# EAGLE board esp_pilote (EAGLE 8.0.0)
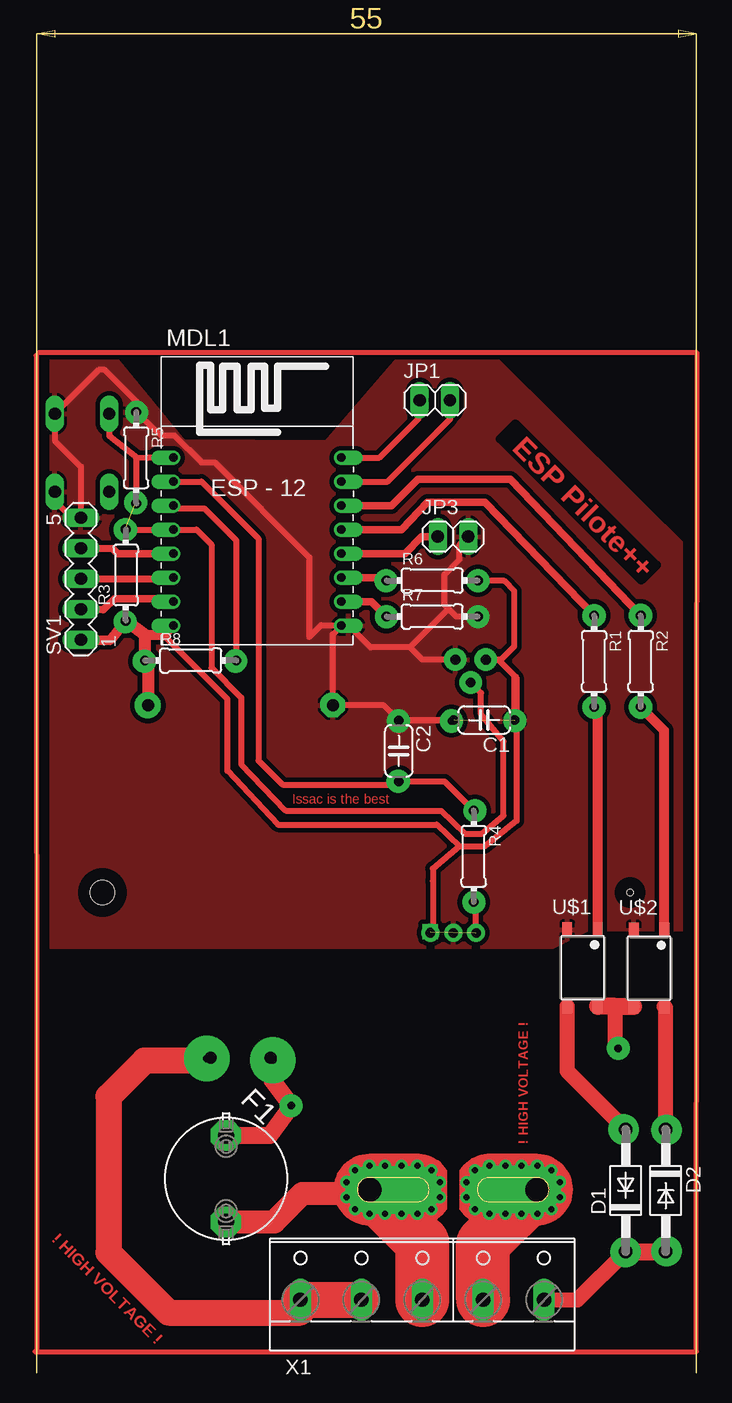
[diagram p0: board, top side]
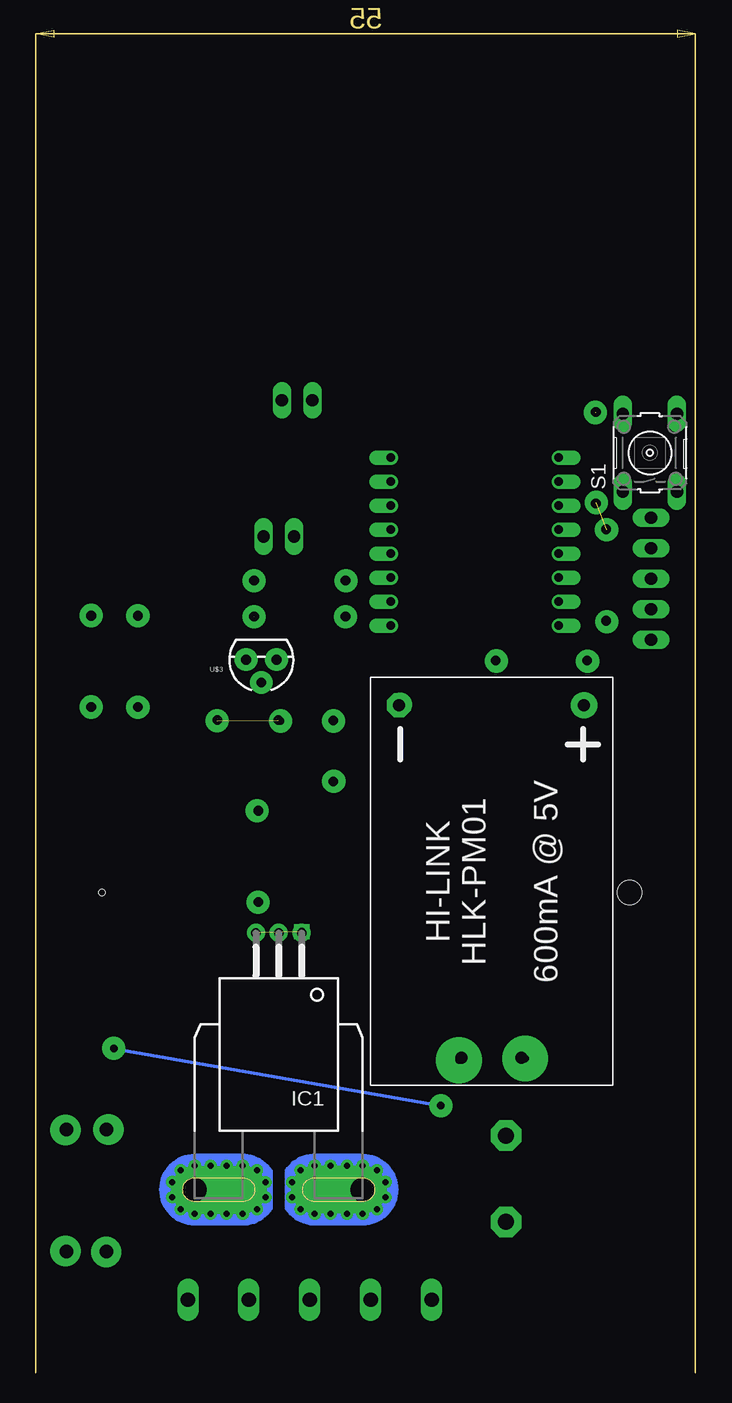
[diagram p1: board, bottom side, seen from below]

Size 55 x 111.88 mm. Coordinates in mm from the lower left corner, seen from the top.
Copper layers (1*16): Top 0.035mm / dielectric 1.5mm / Bottom 0.035mm
Design rules "default *": minimum track width 10mil, minimum drill 24mil, track to track 15mil, track to pad 25mil, pad to pad 25mil, via to via 15mil, smd to smd 25mil, copper to edge 40mil, drill to drill 8mil, minimum pad ring 10mil, minimum via ring 8mil, stop-mask expansion 4mil, vias tented up to drill 0mil, thermal gap 10mil
Net classes: 0 default: width 0.5 mm; 1 15Amp: width 12 mm; 2 10Amp: width 7.2 mm; 3 1Amp: width 0.3 mm; 4 0.5Amp: width 0.12 mm
Holes 2 mm at 5.5,40
Holes 0.5 mm at 49.5,40

## Footprints (pad centres in the part's own frame; a part is rotated, then mirrored left to right if it is on the bottom)
C050-024X044 = drill 0.813 octagon: 1 -2.54,0; 2 2.54,0
DO41-10 = drill 1.118: A 5.08,0; C -5.08,0
19559 = drill 1.321 pad 2.54 octagon: 1 -2.54,2.54; 2 2.54,-2.54
CB-PFF = drill 0.8 pad 1.5: 1 -1.91,-21.4; 2 0,-21.4; 3 1.91,-21.4 | drill 2 pad 4 offset: IP+ 7,0; IP- -7,0 | drill 0.5 pad 0.9: IP+@2 8.89,0.635; IP+@3 8.89,-0.635; IP+@4 8.175,-1.625; IP+@5 7,-2; IP+@6 5.675,-2; IP+@7 4.35,-2; IP+@8 3,-2; IP+@9 1.825,-1.625; IP+@10 1.1,-0.625; IP+@11 1.1,0.625; IP+@12 1.825,1.625; IP+@13 3,2; IP+@14 4.35,2; IP+@15 5.675,2; IP+@16 7,2; IP+@17 8.175,1.625; IP-@2 -8.89,0.635; IP-@3 -8.89,-0.635; IP-@4 -8.175,-1.625; IP-@5 -7,-2; IP-@6 -5.675,-2; IP-@7 -4.325,-2; IP-@8 -3,-2; IP-@9 -1.825,-1.625; IP-@10 -1.1,-0.625; IP-@11 -1.1,0.625; IP-@12 -1.825,1.625; IP-@13 -3,2; IP-@14 -4.325,2; IP-@15 -5.675,2; IP-@16 -7,2; IP-@17 -8.175,1.625
1X02 = drill 1.016 long: 1 -1.27,0; 2 1.27,0
ESP12 = drill 0.7 offset: ADC -7.1,3.8; CH_PD -7.1,1.8; GND 6.9,-8.2; GPIO0 6.9,-2.2; GPIO2 6.9,-4.2; GPIO4 6.9,1.8; GPIO5 6.9,-0.2; GPIO12 -7.1,-4.2; GPIO13 -7.1,-6.2; GPIO14 -7.1,-2.2; GPIO15 6.9,-6.2; GPIO16 -7.1,-0.2; RESET -7.1,5.8; RX 6.9,3.8; TX 6.9,5.8; VCC -7.1,-8.2
0204/7 = drill 0.813 octagon: 1 -3.81,0; 2 3.81,0
B3F-10XX = drill 1.016 long: 1 -3.251,2.261; 2 3.251,2.261; 3 -3.251,-2.261; 4 3.251,-2.261
MA05-1 = drill 1.016 long: 1 -5.08,0; 2 -2.54,0; 3 0,0; 4 2.54,0; 5 5.08,0
MFSOP-4 = smd 0.8 x 1.2: 1 2.54,0; 3 0,0; 4 0,-6.35; 6 2.54,-6.35
TO-92 = drill 0.813 pad 1.88: 1 -1.27,0; 2 0,1.905; 3 1.27,0
HLK-PM01 = drill 1 pad 2 octagon: AC_L -14.7,2.5; AC_N -14.7,-2.5; VO+ 14.7,-7.7; VO- 14.7,7.7
W237-5P = drill 1.194 long: 1 -10.16,-0.635; 2 -5.08,-0.635; 3 0,-0.635; 4 5.08,-0.635; 5 10.16,-0.635

## Placement (x,y rotation side)
C1  0,1µf  [C050-024X044]  37.33,54.37 180 top
C2  ?  [C050-024X044]  30.21,51.8 270 top
D1  1N4007  [DO41-10]  49.13,15.16 90 top
D2  1N4007  [DO41-10]  52.47,15.18 270 top
F1  0,5A  [19559]  15.81,16.15 315 top
IC1  ACS758LCB-050B-PFF-T  [CB-PFF]  34.75,15.24 180 bottom
JP1  [1X02]  33.22,81.02 0 top
JP3  [1X02]  34.74,69.67 0 top
MDL1  ESP  [ESP12]  18.51,70.44 0 top
R1  470  [0204/7]  46.5,59.26 270 top
R2  470  [0204/7]  50.39,59.26 270 top
R3  4.7k  [0204/7]  7.45,66.46 90 top
R4  ?  [0204/7]  36.46,43.01 270 top
R5  10k  [0204/7]  8.31,76.23 270 top
R6  10k  [0204/7]  33,66 0 top
R7  10k  [0204/7]  33,63 0 top
R8  10k  [0204/7]  12.86,59.34 0 top
S1  [B3F-10XX]  3.8,76.64 90 bottom
SV1  [MA05-1]  3.71,66.14 90 top
U$1  TLP168J  [MFSOP-4]  44.26,36.91 0 top
U$2  TLP168J  [MFSOP-4]  49.81,36.87 0 top
U$3  TEMPERATURE-SENSOR  [TO-92]  36.2,59.4 180 bottom
U$4  MAINS_CONVERTERS  [HLK-PM01]  17.01,40.92 90 bottom
X1  [W237-5P]  32.17,6.7 0 top

## Library data of the parts
C1 C2 = resistor
D1 D2 = diode
F1 = fuse; MPN: 55900000001; OC_FARNELL: 9516360; OC_NEWARK: 02P0286
IC1 = allegro; MPN: ACS758LCB-050B-PFF-T; OC_FARNELL: 1718997; OC_NEWARK: 04R7131
JP1 JP3 = pinhead
MDL1 = esp8266modules
R1-R8 = rcl
S1 = switch-omron; MPN: B3F-1000; OC_FARNELL: 176432; OC_NEWARK: 36M3542
SV1 = con-lstb; OC_FARNELL: unknown; OC_NEWARK: unknown
U$1 U$2 = TLP168J
U$3 = Eagle-JeeLabs
U$4 = captain-slow
X1 = con-wago-508; OC_FARNELL: unknown; OC_NEWARK: unknown

## Nets
230FUSED [1Amp]: F1.1 U$1.6 U$2.4 U$4.AC_L
230IN [15Amp]: F1.2 IC1.IP- IC1.IP-@2 IC1.IP-@3 IC1.IP-@4 IC1.IP-@5 IC1.IP-@6 IC1.IP-@7 IC1.IP-@8 IC1.IP-@9 IC1.IP-@10 IC1.IP-@11 IC1.IP-@12 IC1.IP-@13 IC1.IP-@14 IC1.IP-@15 IC1.IP-@16 IC1.IP-@17 X1.3
230OUT [15Amp]: IC1.IP+ IC1.IP+@2 IC1.IP+@3 IC1.IP+@4 IC1.IP+@5 IC1.IP+@6 IC1.IP+@7 IC1.IP+@8 IC1.IP+@9 IC1.IP+@10 IC1.IP+@11 IC1.IP+@12 IC1.IP+@13 IC1.IP+@14 IC1.IP+@15 IC1.IP+@16 IC1.IP+@17 X1.4
CURRENT: C2.2 MDL1.ADC R4.1
DS18B20: MDL1.GPIO16 R3.2 U$3.2
GND: C1.2 C2.1 IC1.2 JP3.2 MDL1.GND R5.1 R7.2 S1.3 S1.4 SV1.5 U$1.3 U$2.3 U$3.1 U$4.VO-
N$1 [1Amp]: D2.C U$2.6
N$2: R1.2 U$1.1
N$3: IC1.3 R4.2
N$4 [1Amp]: D1.A U$1.4
N$5 [1Amp]: MDL1.GPIO13 SV1.2
N$6 [1Amp]: MDL1.GPIO12 SV1.3
N$7 [1Amp]: MDL1.GPIO14 SV1.4
N$8: R2.2 U$2.1
N$10 [1Amp]: MDL1.GPIO5 R1.1
N$11 [1Amp]: MDL1.GPIO4 R2.1
N$13: MDL1.RESET R5.2 S1.2
N$14: JP1.1 MDL1.TX
N$15: JP1.2 MDL1.RX
N$16: MDL1.CH_PD R8.2
N$17: MDL1.GPIO2 R6.1
N$18: MDL1.GPIO15 R7.1
N$19: JP3.1 MDL1.GPIO0
NEUTRAL [15Amp]: U$4.AC_N X1.1 X1.2
PILOTE [1Amp]: D1.C D2.A X1.5
VCC: C1.1 IC1.1 MDL1.VCC R3.1 R6.2 R8.1 SV1.1 U$3.3 U$4.VO+

## Tracks (layer width: path | path; a pad name or v marks a point on that pad's centre or on a via)
230FUSED  (via drill 0.61)
  Top 1.27: v48.5,27 48.25,27.25 48.25,30.52
  Top 1.422: U$2.4 48.25,30.52 46.84,30.52 U$1.6 | F1.1 19.45,19.74 v21.25,22.25 19.57,24.53 U$4.AC_L
  Bottom 0.3: v21.25,22.25 v48.5,27
230IN
  Top 1.93: F1.2 19.81,12.56 22.19,14.93 27.44,14.93 IC1.IP-
  Top 4.5: X1.3 32.17,10.82 IC1.IP-
230OUT
  Top 4.5: X1.4 37.25,10.74 IC1.IP+
CURRENT
  Top 0.5: MDL1.ADC 13.76,74.24 18.5,69.5 18.5,51 20.5,49 29.95,49 C2.2 34.02,49.26 R4.1
DS18B20
  Top 0.5: R3.2 7.86,70.24 MDL1.GPIO16 13.35,70.24 14.59,68.99 14.59,58.72 17.07,56.25 17.07,50.69 20.78,46.83 33.75,46.8 35.71,44.9 37.16,44.9 38.95,46.42 38.95,52.6 37.07,54.84 37.07,56.64 U$3.2
GND  (via drill 0.6 pad 1.93)  (3 unrouted)
  Top 0.5: 34.37,63.63 34,64 34,66.5 35.28,67.78 35.28,68.99 JP3.2 | 34.37,63.63 35,63 R7.2 | 30.21,53.47 C2.1 | MDL1.GND 25.37,62.28 23.74,62.28 22.73,61.28 22.73,67.95 14.85,75.84 13.76,75.84 11.52,78.08 10.43,78.08 R5.1 8.51,80.75 5.7,83.55 5.2,83.55 S1.4 1.54,77.66 3.7,75.5 SV1.5 | MDL1.GND 26.06,62.24 27.86,60.43 31.17,60.43 | 31.17,60.43 34.37,63.63 | U$3.1 32.19,59.4 31.17,60.43 | SV1.5 4.73,71.31 | C2.1 28.93,55.62 U$4.VO- 24.71,61.54 MDL1.GND | C2.1 30.29,54.34 C1.2 30.24,54.37 v30.17,54.3 | 2.97,71.21 SV1.5 | 2.97,71.21 2.52,71.2 | S1.3 1.54,72.63 2.97,71.21
  other vias: 39.9,54.33 24.62,55.67 36.82,62.98 8.34,80.01
  pour Top: -0.33,84.88 -0.5,35.5 43,35.5 46,37 55,37 55.12,67.72 38.16,84.54 30.17,84.5 24.15,77.48 12.28,77.57 6.25,84.84
N$1
  Top 1.27: D2.C 52.47,30.4 U$2.6
N$2
  Top 0.61: R1.2 46.8,55.15
  Top 0.813: U$1.1 46.8,55.15 R1.2
N$3  (via drill 0.61 pad 1.27)  (1 unrouted)
  Top 0.5: IC1.3 36.66,39.01 R4.2
  other vias: 32.84,36.74
N$4
  Top 1.27: D1.A 44.26,25.12 U$1.4
N$5
  Top 0.61: SV1.2 5.58,63.58 6.5,64.5 11.15,64.5 MDL1.GPIO13
N$6
  Top 0.61: SV1.3 11.29,66.12 MDL1.GPIO12
N$7
  Top 0.61: SV1.4 6.34,68.66 6.75,68.25 MDL1.GPIO14
N$8
  Top 0.813: U$2.1 52.35,53.49 R2.2
N$10
  Top 0.61: MDL1.GPIO5 30.43,70.24 32.59,72.53 37.4,72.53 R1.1
N$11
  Top 0.5: 35.71,74.42
  Top 0.61: R2.1 39.52,74.46 35.71,74.42 31.8,74.42 29.62,72.24 MDL1.GPIO4
N$12
  Top 0.406: -0.14,1.75 55.04,1.73 55.09,84.98 0.22,84.98
N$13
  Top 0.5: MDL1.RESET 9.26,76.22 8.29,76.2 | 8.29,76.2 8.31,72.52 R5.2 | 8.29,76.2 8.42,76.18 6.08,78.04 6.08,79.88 S1.2
N$14
  Top 0.5: MDL1.TX 28.59,76.24 31.88,79.53 31.88,81.93 JP1.1
N$15
  Top 0.5: MDL1.RX 29.28,74.24 34.5,79.46 34.5,81.86 JP1.2
N$16
  Top 0.5: MDL1.CH_PD 11.65,72 14,72 16.67,69.33 R8.2
N$17
  Top 0.61: MDL1.GPIO2 28.95,66.24 R6.1
N$18
  Top 0.61: MDL1.GPIO15 27.95,64.24 R7.1
N$19
  Top 0.61: MDL1.GPIO0 30.71,68.24 32.1,69.63 33.43,69.63 JP3.1
N$22  (via drill 0.6 pad 1.93)
  other vias: 29.16,65.99
N$23  (via drill 0.6 pad 1.93)
  other vias: 29.18,62.97
N$25  (via drill 0.6 pad 1.93)
  other vias: 36.81,65.98
N$26  (via drill 0.6 pad 1.93)
  other vias: 9,59.27
N$27  (via drill 0.6 pad 1.93)
  other vias: 16.6,59.29
N$29  (via drill 0.6 pad 1.93)
  other vias: 34.61,54.29
N$30  (via drill 0.6 pad 1.93)
  other vias: 30.16,49.28
N$32  (via drill 0.6 pad 1.93)
  other vias: 36.56,46.81
N$33  (via drill 0.6 pad 1.93)
  other vias: 36.47,39.19
N$36  (via drill 0.6 pad 1.93)
  other vias: 46.5,55.45
N$37  (via drill 0.6 pad 1.93)
  other vias: 50.38,55.45
N$38  (via drill 0.6 pad 1.93)
  other vias: 50.38,63.09
N$39  (via drill 0.6 pad 1.93)
  other vias: 46.5,63.07
N$40  (via drill 0.6 pad 1.93)
  other vias: 7.39,62.57
N$41  (via drill 0.6 pad 1.93)  (1 unrouted)
  other vias: 7.41,70.24 8.27,72.5
N$42  (via drill 0.6 pad 1.93)
  other vias: 21.23,22.23
N$43  (via drill 0.6 pad 1.93)
  other vias: 48.51,27.02
N$44  (via drill 0.6 pad 2.54)
  other vias: 48.97,20.24
N$45  (via drill 0.6 pad 2.54)
  other vias: 52.53,20.2
N$46  (via drill 0.6 pad 2.54)
  other vias: 49.14,10.06
N$47  (via drill 0.6 pad 2.54)
  other vias: 52.54,10.13
N$48  (via drill 0.6 pad 3.81)
  other vias: 19.72,26.01
N$49  (via drill 0.6 pad 3.81)
  other vias: 14.21,26.16
N$50  (via drill 0.6 pad 2.18)
  other vias: 9.28,55.6
N$53
  Top 0.406: -0.02,84.75 0.01,1.7
NEUTRAL
  Top 2.184: U$4.AC_N 14.29,26 9,26 6,23 6,10 11,5 22,5 22.5,5.5 X1.1
  Top 3: X1.1 X1.2
PILOTE
  Top 1.27: X1.5 45.12,6.06 D1.C
  Top 1.422: D1.C 52.46,10.08 D2.A
VCC
  Top 0.5: R6.2 36.84,65.97 39,65.97 39.85,65.12 39.85,60.51 38.75,59.4 U$3.3 38.52,59.4 39.87,58.05 | 9.38,55.62 U$4.VO+ 9.31,55.92 | 39.87,58.05 40,57.93 40.03,45.97 37.41,43.86 35.27,43.86 | 35.27,43.86 33.04,41.99 33.04,40.96 33.04,36.84 IC1.1 | C1.1 39.87,58.05 | 35.27,43.86 33.38,45.65 20.13,45.65 15.92,50.15 15.92,56.11 10.6,61.43
  Top 0.813: SV1.1 6.14,61.04 R3.1 | 9.05,61.43 10.6,61.43 MDL1.VCC
  Top 1.016: R3.1 9.05,61.43 R8.1 9.31,59.08 U$4.VO+

## Text on the board
Top: ESP Pilote++ | Issac is the best | ! HIGH VOLTAGE ! | ! HIGH VOLTAGE !